# EAGLE board microSRCP-RaspiV1 (EAGLE 6.5.0)
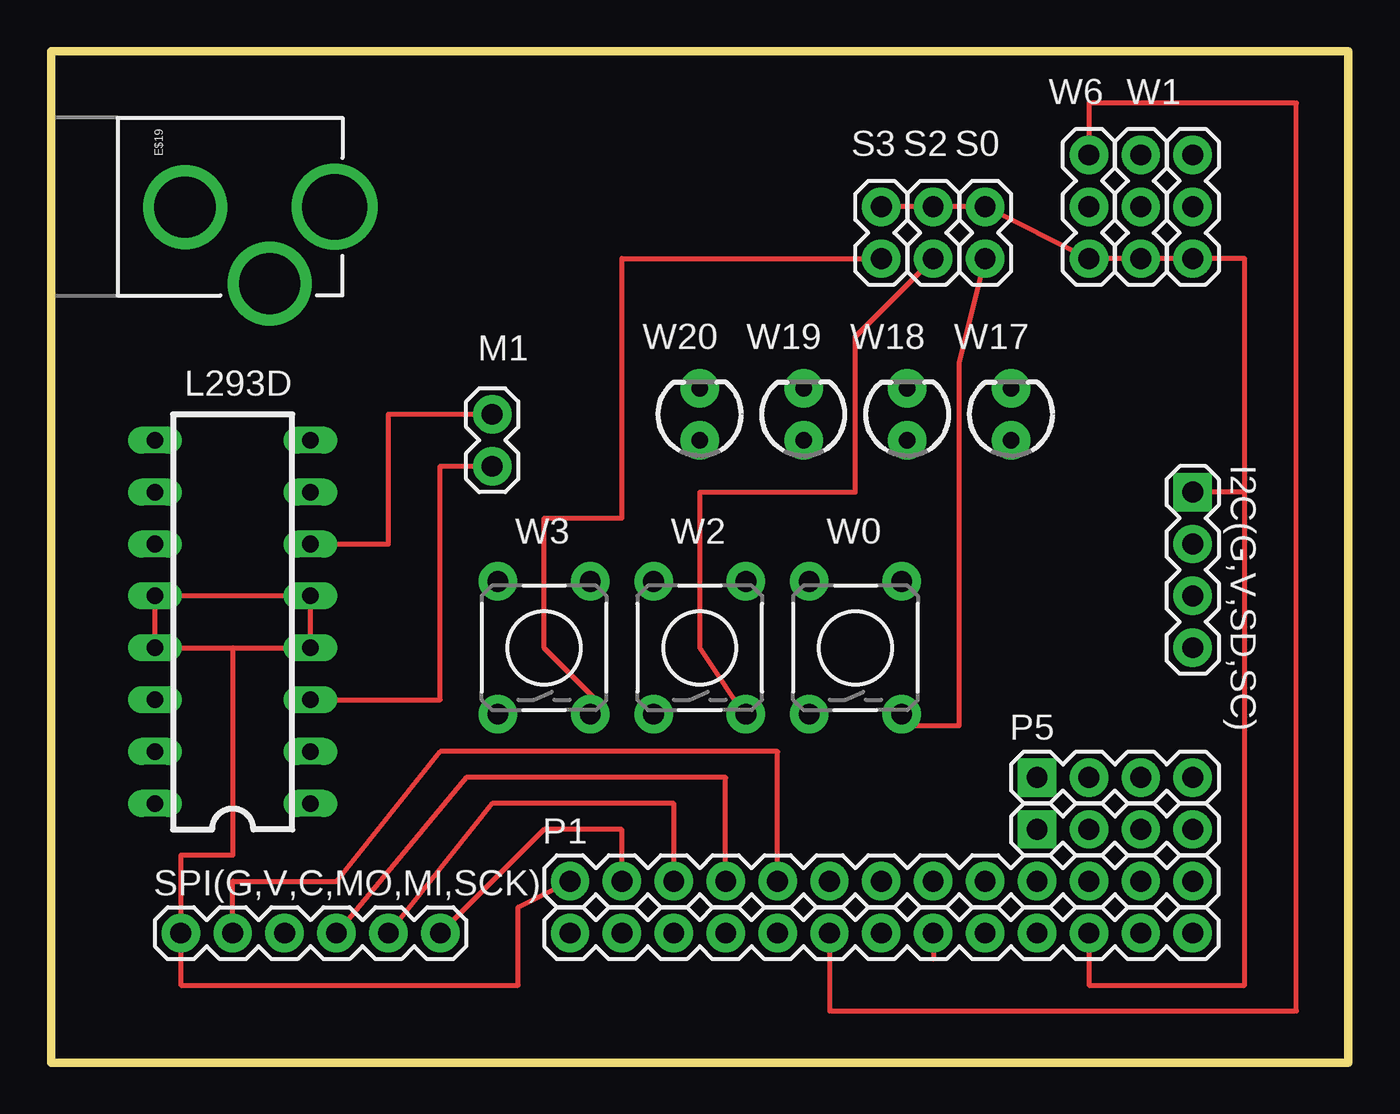
[diagram p0: board, top side]
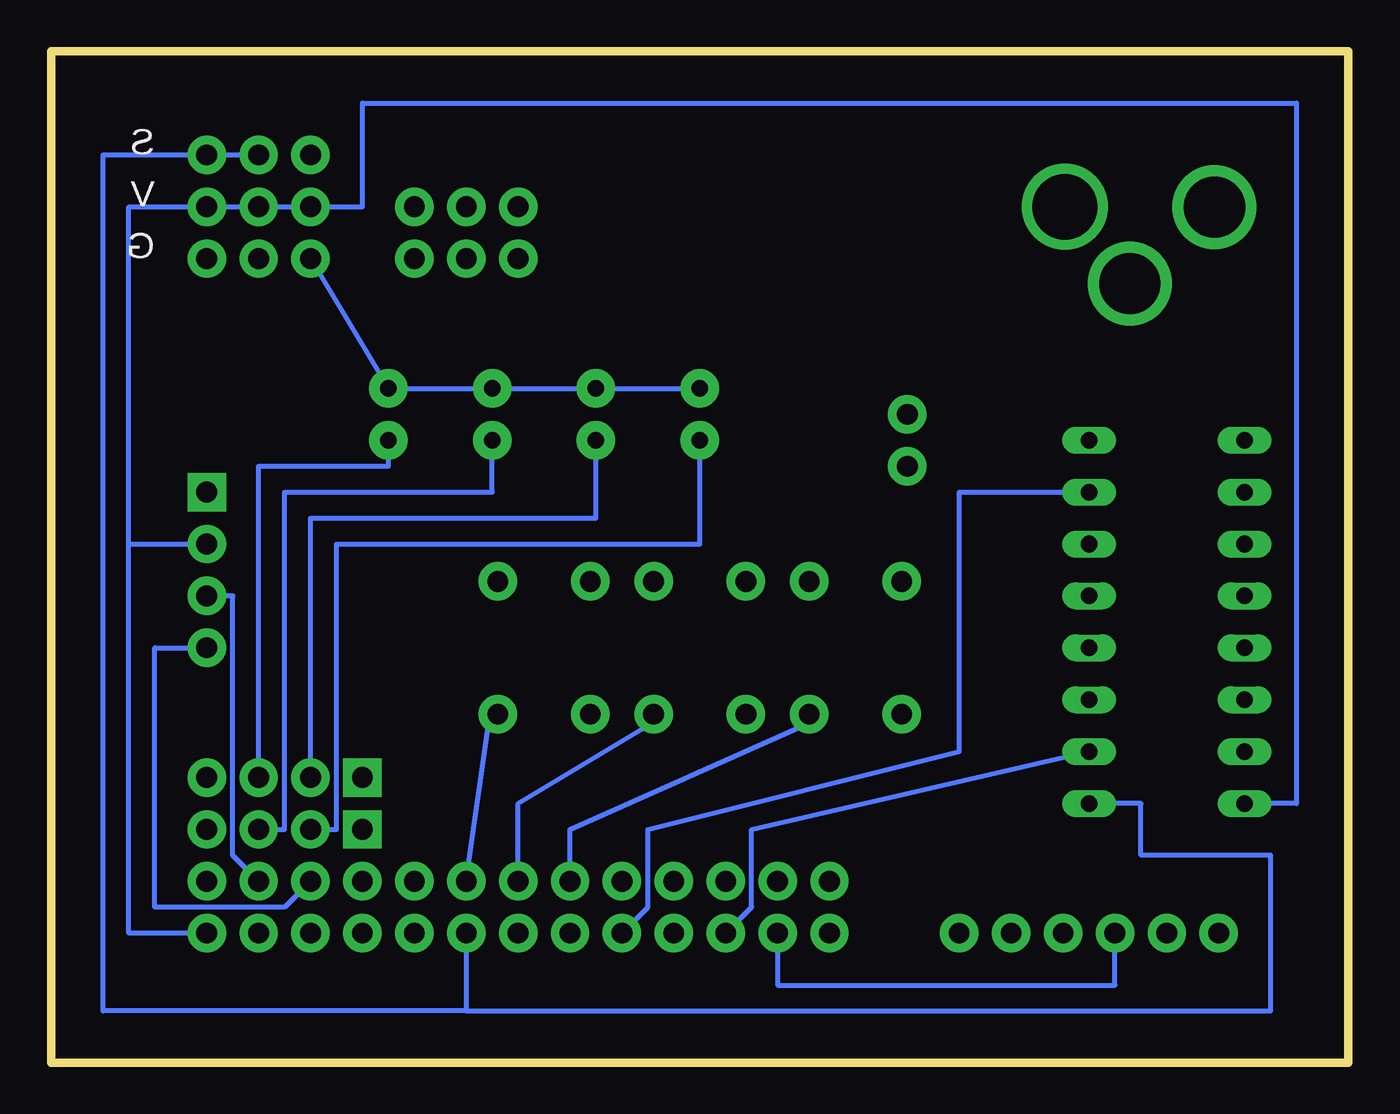
[diagram p1: board, bottom side, seen from below]

Size 63.5 x 49.53 mm. Coordinates in mm from the lower left corner, seen from the top.
Outline: 0,0 63.5,0 63.5,49.53 0,49.53 0,0
Copper layers (1*16): Top 0.035mm / dielectric 1.5mm / Bottom 0.035mm
Design rules "default": minimum track width 10mil, minimum drill 24mil, track to track 8mil, track to pad 8mil, pad to pad 8mil, via to via 8mil, smd to smd 8mil, copper to edge 40mil, drill to drill 8mil, minimum pad ring 10mil, minimum via ring 8mil, stop-mask expansion 4mil, vias tented up to drill 0mil, thermal gap 10mil

## Footprints (pad centres in the part's own frame; a part is rotated, then mirrored left to right if it is on the bottom)
1X13 = drill 1.016 pad 1.88: 1 0,0; 2 2.54,0; 3 5.08,0; 4 7.62,0; 5 10.16,0; 6 12.7,0; 7 15.24,0; 8 17.78,0; 9 20.32,0; 10 22.86,0; 11 25.4,0; 12 27.94,0; 13 30.48,0
1X04 = drill 1.016 pad 1.88 square: 1 0,0 | drill 1.016 pad 1.88: 2 2.54,0; 3 5.08,0; 4 7.62,0
POWER_JACK_PTH_LOCK = drill 2.997 pad 4.115: GND 0.025,6.557; GNDBREAK 3.762,10.7 | drill 3.2 pad 4.115: PWR 0,13.878
DIL16 = drill 0.813 long: 1 -8.89,-3.81; 2 -6.35,-3.81; 3 -3.81,-3.81; 4 -1.27,-3.81; 5 1.27,-3.81; 6 3.81,-3.81; 7 6.35,-3.81; 8 8.89,-3.81; 9 8.89,3.81; 10 6.35,3.81; 11 3.81,3.81; 12 1.27,3.81; 13 -1.27,3.81; 14 -3.81,3.81; 15 -6.35,3.81; 16 -8.89,3.81
1X02 = drill 1.016 pad 1.88: 1 0,0; 2 2.54,0
1X06 = drill 1.016 pad 1.88: 1 0,0; 2 2.54,0; 3 5.08,0; 4 7.62,0; 5 10.16,0; 6 12.7,0
TACTILE-PTH = drill 1.016 pad 1.88: 1 -3.251,2.261; 2 3.251,2.261; 3 -3.251,-2.261; 4 3.251,-2.261
1X03 = drill 1.016 pad 1.88: 1 0,0; 2 2.54,0; 3 5.08,0
LED3MM = drill 0.813 pad 1.88: A -1.27,0; K 1.27,0

## Placement (x,y rotation side)
E$1  [1X13]  25.4,6.35 0 top
E$3  [1X04]  48.26,11.43 0 top
E$19  [POWER_JACK_PTH_LOCK]  0,41.91 270 top
I2C(G,V,SD,SC)  [1X04]  55.88,27.94 270 top
L293D  [DIL16]  8.89,21.59 90 top
M1  [1X02]  21.59,31.75 270 top
P1  [1X13]  25.4,8.89 0 top
P5  [1X04]  48.26,13.97 0 top
S0  [1X02]  45.72,39.37 90 top
S2  [1X02]  43.18,39.37 90 top
S3  [1X02]  40.64,39.37 90 top
SPI(G,V,C,MO,MI,SCK)  [1X06]  6.35,6.35 0 top
W0  [TACTILE-PTH]  39.37,20.32 90 top
W1  [1X03]  53.34,39.37 90 top
W1N  [1X03]  55.88,39.37 90 top
W2  [TACTILE-PTH]  31.75,20.32 90 top
W3  [TACTILE-PTH]  24.13,20.32 90 top
W6  [1X03]  50.8,39.37 90 top
W17  [LED3MM]  46.99,31.75 90 top
W18  [LED3MM]  41.91,31.75 90 top
W19  [LED3MM]  36.83,31.75 90 top
W20  [LED3MM]  31.75,31.75 90 top

## Library data of the parts
E$1 E$3 E$19 I2C(G,V,SD,SC) P1 P5 = SparkFun-Connectors
L293D = SparkFun-DigitalIC
M1 S0 S2 S3 W1 W6 = SparkFun-Capacitors
SPI(G,V,C,MO,MI,SCK) = SparkFun-Boards
W0 W2 W3 = SparkFun-Electromechanical
W1N = SparkFun-Sensors
W17-W20 = SparkFun-LED

## Nets
5V: E$1.13 I2C(G,V,SD,SC).2 L293D.16 W1.2 W1N.2 W6.2
GND: L293D.4 L293D.5 L293D.12 L293D.13 P1.1 SPI(G,V,C,MO,MI,SCK).1
GND2: E$1.11 I2C(G,V,SD,SC).1 S0.2 S2.2 S3.2 W1.1 W1N.1 W6.1 W17.K W18.K W19.K W20.K
S1: E$1.8 L293D.1 W1.3 W1N.3
S$1: P5.3 W17.A
S$2: E$3.3 W18.A
S$3: P5.2 W19.A
S$4: E$3.2 W20.A
S$5: P1.8
S$6: P1.7
S$7: P1.6
S$8: P1.4 SPI(G,V,C,MO,MI,SCK).4
S$9: P1.2 SPI(G,V,C,MO,MI,SCK).6
S$10: P1.3 SPI(G,V,C,MO,MI,SCK).5
S$11: E$1.2 SPI(G,V,C,MO,MI,SCK).3
S$13: E$1.5 L293D.7
S$14: E$1.3 L293D.2
S$15: E$1.6 W6.3
S$16: L293D.6 M1.1
S$17: L293D.3 M1.2
S$19: S0.1
S$20: S2.1
S$21: S3.1
S$23: I2C(G,V,SD,SC).3 P1.12
S$24: I2C(G,V,SD,SC).4 P1.11
VCC: P1.5 SPI(G,V,C,MO,MI,SCK).2

## Tracks (layer width: path | path; a pad name or v marks a point on that pad's centre or on a via)
5V
  Bottom 0.254: E$1.13 59.69,6.35 59.69,25.4 | 59.69,25.4 I2C(G,V,SD,SC).2 | 59.69,25.4 59.69,41.91 W1N.2 W1.2 W6.2 48.26,41.91 48.26,46.99 2.54,46.99 2.54,12.7 L293D.16
GND
  Top 0.254: 8.89,20.32 L293D.13 L293D.12 L293D.5 L293D.4 8.89,20.32 | 8.89,20.32 8.89,10.16 6.35,10.16 SPI(G,V,C,MO,MI,SCK).1 6.35,3.81 22.86,3.81 22.86,7.62 P1.1
GND2
  Top 0.254: E$1.11 50.8,3.81 58.42,3.81 58.42,27.94 | 58.42,27.94 I2C(G,V,SD,SC).1 | 58.42,27.94 58.42,39.37 W1N.1 W1.1 W6.1 S0.2 S2.2 S3.2
  Bottom 0.254: W6.1 W17.K W18.K W19.K W20.K
S1
  Top 0.254: E$1.8 43.18,5.08
  Bottom 0.254: E$1.8 43.18,2.54 | 43.18,2.54 3.81,2.54 3.81,10.16 10.16,10.16 10.16,12.7 L293D.1 | 43.18,2.54 60.96,2.54 60.96,44.45 W1N.3 W1.3
S$1
  Bottom 0.254: P5.3 53.34,29.21 46.99,29.21 W17.A
S$2
  Bottom 0.254: E$3.3 52.07,11.43 52.07,27.94 41.91,27.94 W18.A
S$3
  Bottom 0.254: P5.2 50.8,26.67 36.83,26.67 W19.A
S$4
  Bottom 0.254: E$3.2 49.53,11.43 49.53,25.4 31.75,25.4 W20.A
S$5
  Bottom 0.254: P1.8 41.91,17.78
S$6
  Bottom 0.254: P1.7 40.64,12.7 34.29,16.51
S$7
  Bottom 0.254: P1.6 38.1,11.43 26.67,16.51
S$8
  Top 0.254: P1.4 33.02,13.97 20.32,13.97 SPI(G,V,C,MO,MI,SCK).4
S$9
  Top 0.254: P1.2 27.94,11.43 24.13,11.43 SPI(G,V,C,MO,MI,SCK).6
S$10
  Top 0.254: P1.3 30.48,12.7 21.59,12.7 SPI(G,V,C,MO,MI,SCK).5
S$11
  Bottom 0.254: E$1.2 27.94,3.81 11.43,3.81 SPI(G,V,C,MO,MI,SCK).3
S$13
  Bottom 0.254: E$1.5 34.29,7.62 34.29,11.43 19.05,15.24 19.05,27.94 L293D.7
S$14
  Bottom 0.254: E$1.3 29.21,7.62 29.21,11.43 L293D.2
S$15
  Top 0.254: E$1.6 38.1,2.54 60.96,2.54 60.96,46.99 50.8,46.99 W6.3
S$16
  Top 0.254: L293D.6 16.51,25.4 16.51,31.75 M1.1
S$17
  Top 0.254: L293D.3 19.05,17.78 19.05,29.21 M1.2
S$19
  Top 0.254: 41.91,16.51 44.45,16.51 44.45,34.29 S0.1
S$20
  Top 0.254: 34.29,16.51 31.75,20.32 31.75,27.94 39.37,27.94 39.37,35.56 S2.1
S$21
  Top 0.254: 26.67,17.78 24.13,20.32 24.13,26.67 27.94,26.67 27.94,39.37 S3.1
S$23
  Bottom 0.254: P1.12 54.61,10.16 54.61,22.86 I2C(G,V,SD,SC).3
S$24
  Bottom 0.254: P1.11 52.07,7.62 58.42,7.62 58.42,20.32 I2C(G,V,SD,SC).4
VCC
  Top 0.254: SPI(G,V,C,MO,MI,SCK).2 8.89,8.89 13.97,8.89 19.05,15.24 35.56,15.24 P1.5

## Text on the board
bNames: S | V | G